# Allegro board S071AA-0413-20260423_Power.brd
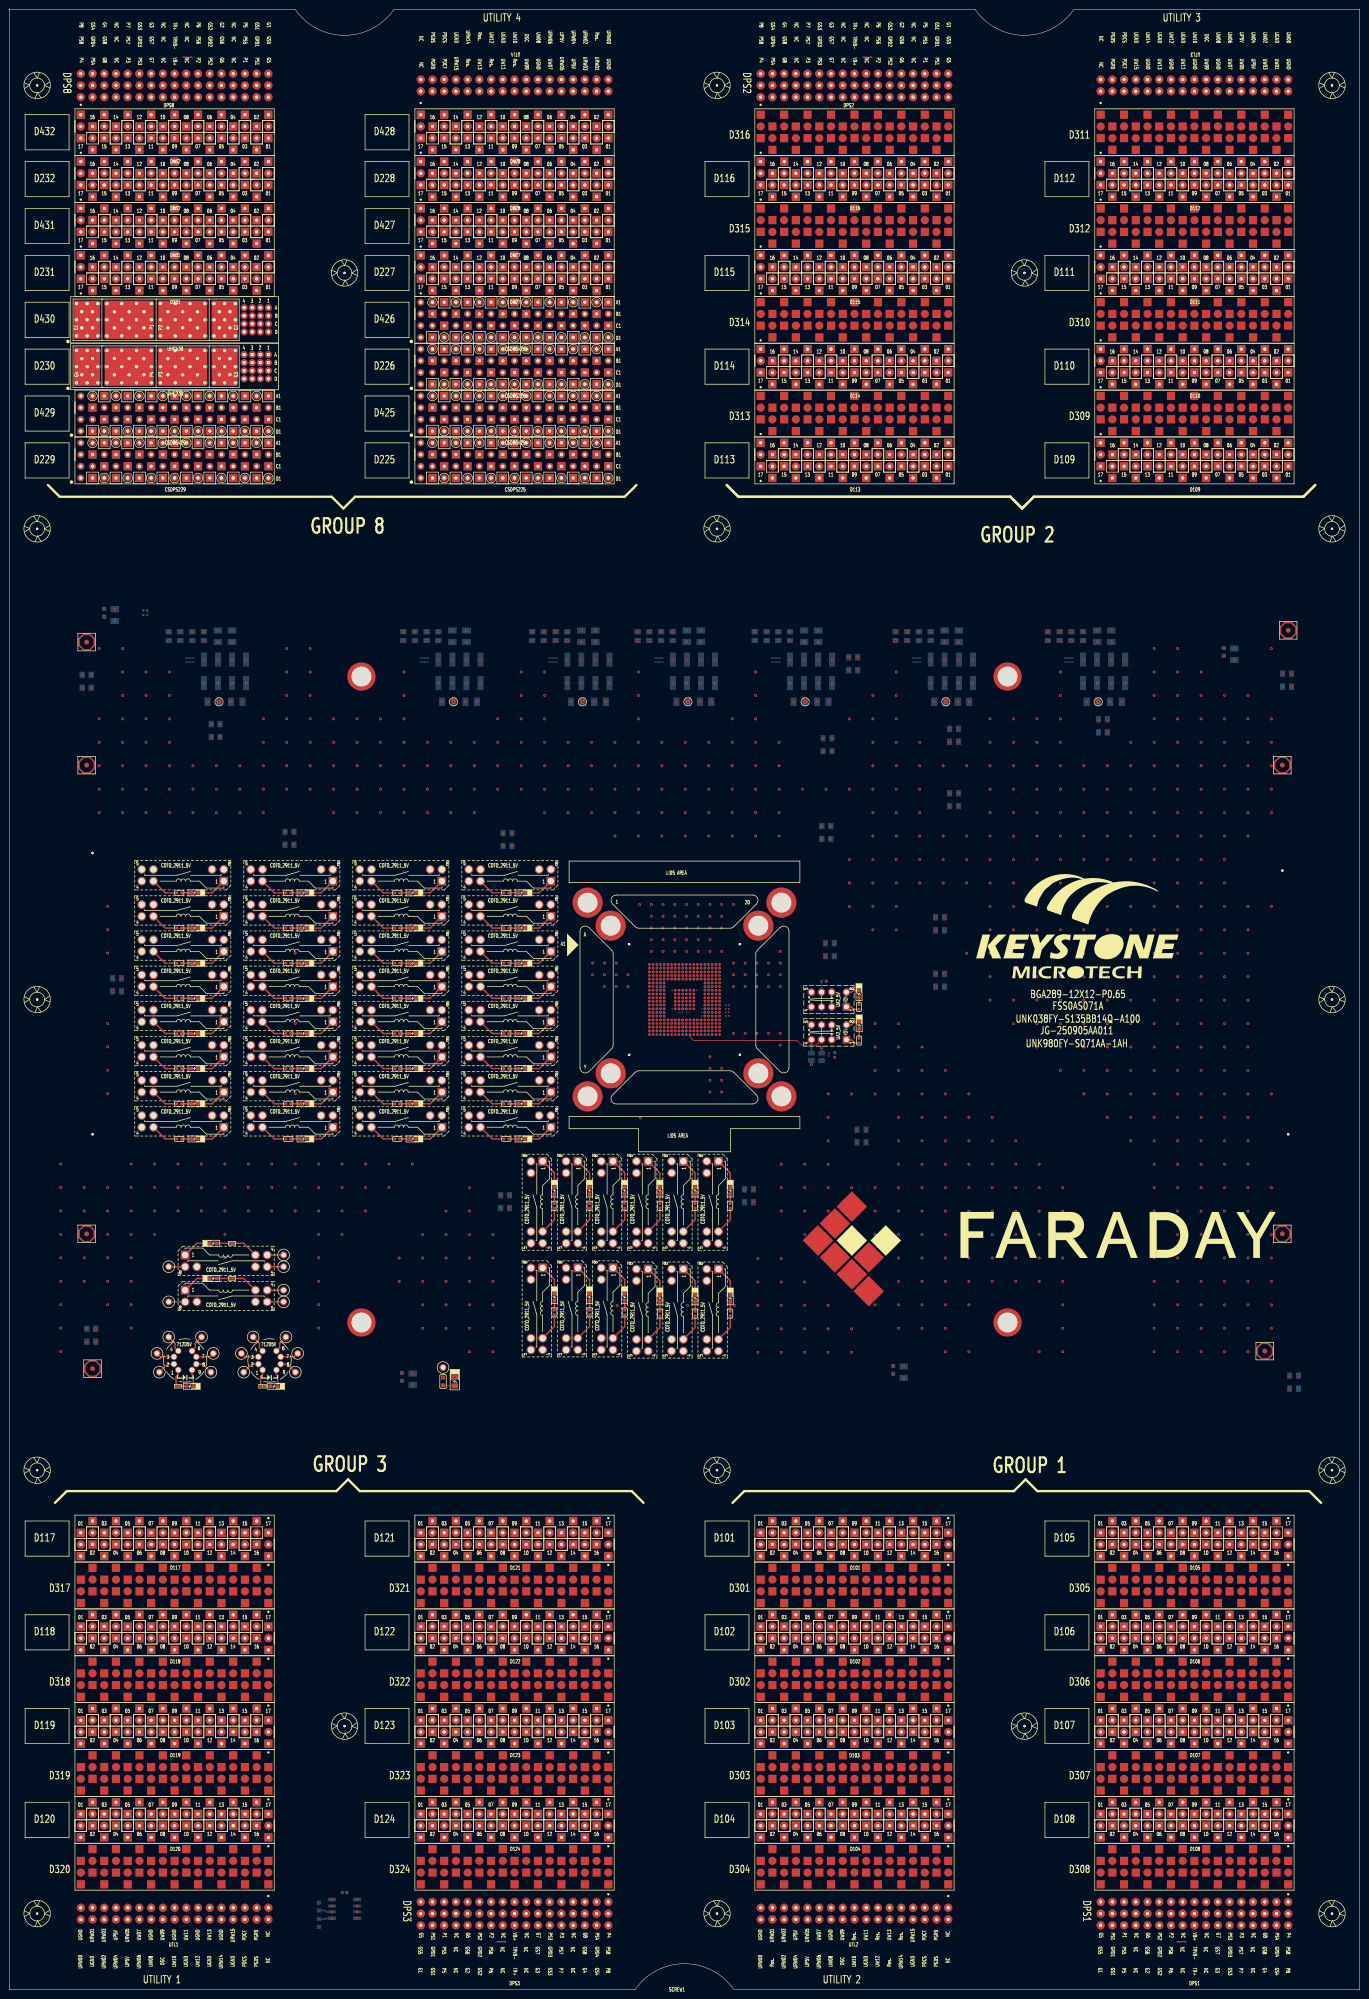
[diagram p0: board, top side]
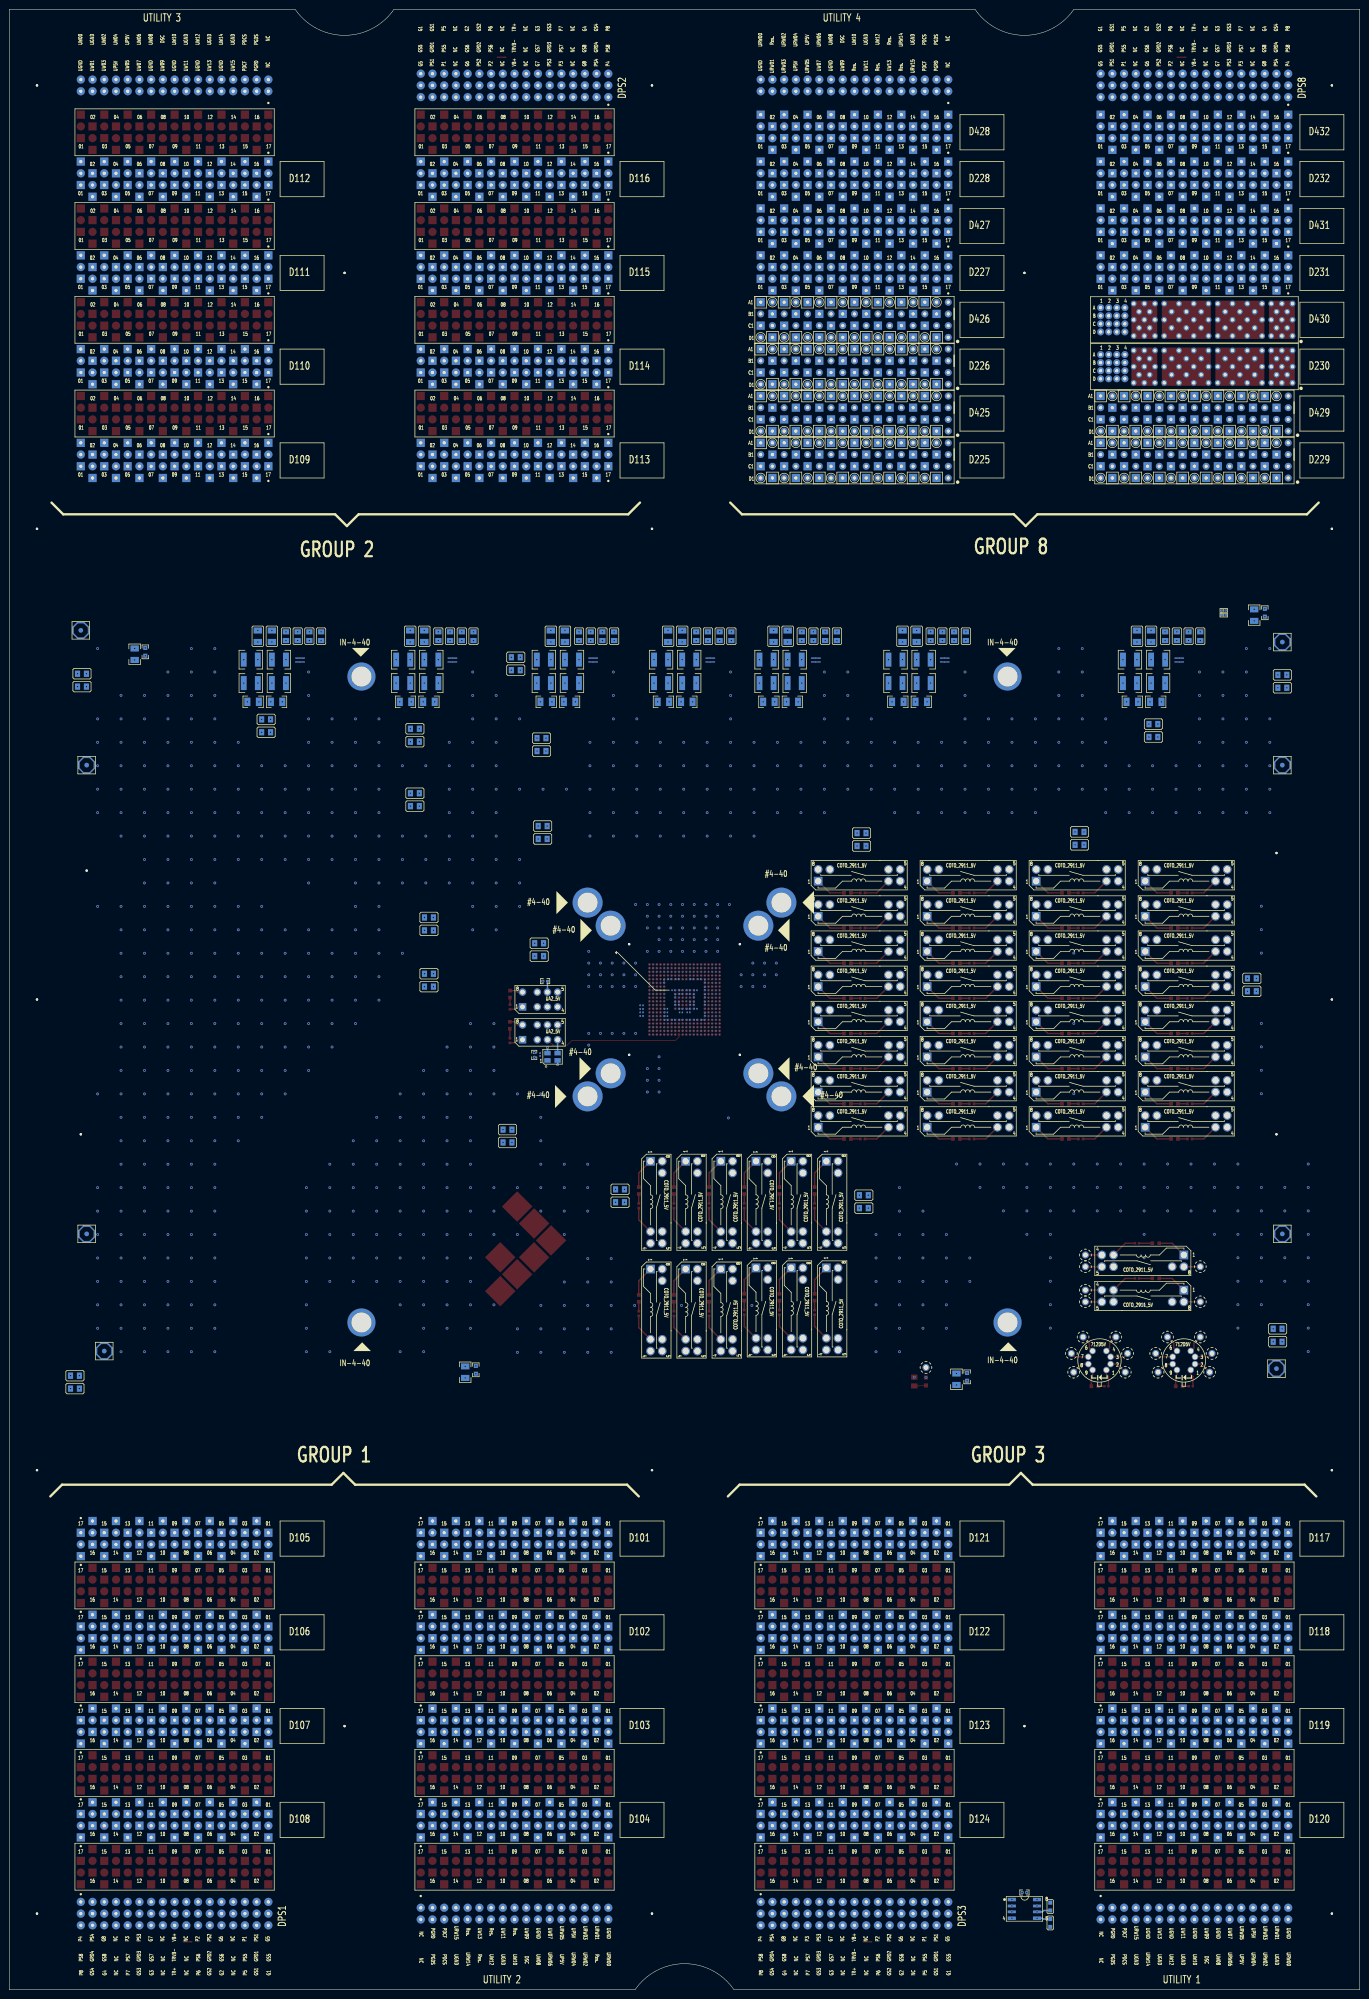
[diagram p1: board, bottom side, seen from below]

Outline 292.64 x 429.26 mm; copper layers: TOP, L02_DGND, L03_DIG, L04_DGND, L05_DIG, L06_DGND, L07_DIG, L08_DGND, L09_DPS, L10_DGND, L11_DPS, L12_DGND, L13_CBIT, L14_5V, L15_DGND, L16_DPS, L17_DGND, L18_DIG, L19_DGND, L20_DIG, L21_DGND, L22_DIG, L23_DGND, L24_DIG, L25_DGND, BOTTOM. Coordinates in mm from the lower left corner of the outline.

## Placement (name value [footprint] x y rotation side)
BDB4  BD120-3A-S8  [FB0805]  17.8 140.46 180 bottom
BDB5  BD120-3A-S8  [FB0805]  204.74 270.51 180 bottom
BDB6  BD120-3A-S8  [FB0805]  204.74 256.54 180 bottom
BDB7  BD120-3A-S8  [FB0805]  201.69 229.62 180 bottom
BDB8  BD120-3A-S8  [FB0805]  201.69 217.42 180 bottom
BDB9  BD120-3A-S8  [FB0805]  160.29 170.69 180 bottom
BDB10  BD120-3A-S8  [FB0805]  107.46 172.21 180 bottom
BDB13  BD120-3A-S8  [FB0805]  107.97 250.7 180 bottom
BDB14  BD120-3A-S8  [FB0805]  60.72 250.95 180 bottom
BDB15  BD120-3A-S8  [FB0805]  107.97 247.9 180 bottom
BDB16  BD120-3A-S8  [FB0805]  60.72 248.16 180 bottom
BDB17  BD120-3A-S8  [FB0805]  107.46 169.42 180 bottom
BDB18  BD120-3A-S8  [FB0805]  160.29 173.48 180 bottom
BDB19  BD120-3A-S8  [FB0805]  276.88 285.24 180 bottom
BDB20  BD120-3A-S8  [FB0805]  278.4 130.3 180 bottom
BDB21  BD120-3A-S8  [FB0805]  278.4 133.1 180 bottom
BDB22  BD120-3A-S8  [FB0805]  177.05 249.43 180 bottom
BDB23  BD120-3A-S8  [FB0805]  177.05 252.22 180 bottom
BDB24  BD120-3A-S8  [FB0805]  177.82 224.03 180 bottom
BDB25  BD120-3A-S8  [FB0805]  177.82 226.82 180 bottom
BDB26  BD120-3A-S8  [FB0805]  182.88 288.8 180 bottom
BDB27  BD120-3A-S8  [FB0805]  182.88 286 180 bottom
BDB28  BD120-3A-S8  [FB0805]  177.31 271.27 180 bottom
BDB29  BD120-3A-S8  [FB0805]  177.31 268.48 180 bottom
BDB30  BD120-3A-S8  [FB0805]  44.72 271.53 180 bottom
BDB31  BD120-3A-S8  [FB0805]  44.72 274.32 180 bottom
BDB32  BD120-3A-S8  [FB0805]  23.38 216.41 180 bottom
BDB33  BD120-3A-S8  [FB0805]  23.38 219.2 180 bottom
BDB34  BD120-3A-S8  [FB0805]  236.98 275.34 180 bottom
BDB35  BD120-3A-S8  [FB0805]  236.98 272.54 180 bottom
BDB36  BD120-3A-S8  [FB0805]  184.67 186.44 180 bottom
BDB37  BD120-3A-S8  [FB0805]  184.67 183.64 180 bottom
BDB38  BD120-3A-S8  [FB0805]  204.74 273.3 180 bottom
BDB39  BD120-3A-S8  [FB0805]  204.74 259.33 180 bottom
BDB40  BD120-3A-S8  [FB0805]  201.69 232.41 180 bottom
BDB41  BD120-3A-S8  [FB0805]  201.69 220.22 180 bottom
BDB42  BD120-3A-S8  [FB0805]  276.88 282.45 180 bottom
BDB43  BD120-3A-S8  [FB0805]  17.8 143.26 180 bottom
BDB44  BD120-3A-S8  [FB0805]  16.78 284.99 180 bottom
BDB45  BD120-3A-S8  [FB0805]  16.78 282.19 180 bottom
BGA289-12X12-P0.65  REF-CODE-SOCKET  [SOCKET_CODE]  231.41 215.9 0 top
C1  0.01U-16-X7R-S4-YA  [C0402]  178.87 202.62 270 bottom
C2  3.3U-10-X-S4-TDK  [C0402]  176.52 218.6 0 bottom
C3  10U-25-X7R-SA  [C1206]  150.89 279.15 0 bottom
C4  NC/10U-25-X7R-SA  [C1206]  145.81 279.15 180 bottom
C5  22U-16-X-SB  [C1210]  151.4 283.21 0 bottom
C6  NC/47U-16-X5R-SB-MU  [C1210]  151.4 288.29 0 bottom
C7  NC/100U-10-X5R-SB-MU  [C1210]  145.3 288.29 180 bottom
C8  NC/22U-16-X-SB  [C1210]  145.3 283.21 180 bottom
C9  0.1U-16-X-S2-TDK  [C0201]  177.6 202.69 270 bottom
C10  0.1U-16-X-S2-TDK  [C0201]  148.72 210.23 0 bottom
C11  0.1U-16-X-S2-TDK  [C0201]  143.92 210.23 180 bottom
C12  0.1U-16-X-S2-TDK  [C0201]  147.08 211.84 180 bottom
C13  0.1U-16-X-S2-TDK  [C0201]  145.52 210.23 0 bottom
C14  0.1U-16-X-S2-TDK  [C0201]  147.12 212.63 180 bottom
C15  0.1U-16-X-S2-TDK  [C0201]  145.45 211.84 0 bottom
C16  0.1U-16-X-S2-TDK  [C0201]  145.52 212.63 0 bottom
C17  0.1U-16-X-S2-TDK  [C0201]  142.32 210.23 0 bottom
C18  0.1U-16-X-S2-TDK  [C0201]  141.92 211.43 90 bottom
C19  0.1U-16-X-S2-TDK  [C0201]  148.32 213.83 90 bottom
C20  0.1U-16-X-S2-TDK  [C0201]  155.61 211.84 0 bottom
C21  0.1U-16-X-S2-TDK  [C0201]  141.92 215.43 90 bottom
C22  0.1U-16-X-S2-TDK  [C0201]  155.61 212.6 0 bottom
C23  0.1U-16-X-S2-TDK  [C0201]  155.61 213.36 0 bottom
C24  0.1U-16-X-S2-TDK  [C0201]  155.61 211.07 0 bottom
C25  0.1U-16-X-S2-TDK  [C0201]  150.32 211.03 180 bottom
C26  0.1U-16-X-S2-TDK  [C0201]  150.32 212.63 180 bottom
C27  0.1U-16-X-S2-TDK  [C0201]  150.32 210.23 180 bottom
C28  0.1U-16-X-S2-TDK  [C0201]  147.12 210.23 180 bottom
C29  0.1U-16-X-S2-TDK  [C0201]  150.32 211.83 180 bottom
C30  0.1U-16-X-S2-TDK  [C0201]  141.92 213.83 270 bottom
C31  0.1U-16-X-S2-TDK  [C0201]  141.92 217.03 270 bottom
C32  0.1U-16-X-S2-TDK  [C0201]  149.52 219.03 180 bottom
C33  0.1U-16-X-S2-TDK  [C0201]  141.92 218.63 90 bottom
C34  0.1U-16-X-S2-TDK  [C0201]  150.72 218.63 270 bottom
C35  0.1U-16-X-S2-TDK  [C0201]  147.92 219.03 0 bottom
C36  0.1U-16-X-S2-TDK  [C0201]  144.72 219.03 0 bottom
C37  0.1U-16-X-S2-TDK  [C0201]  143.12 219.03 180 bottom
C38  0.1U-16-X-S2-TDK  [C0201]  144.32 215.43 270 bottom
C39  0.1U-16-X-S2-TDK  [C0201]  147.52 213.83 90 bottom
C40  0.1U-16-X-S2-TDK  [C0201]  143.92 212.63 180 bottom
C41  0.1U-16-X-S2-TDK  [C0201]  145.12 213.83 90 bottom
C42  0.1U-16-X-S2-TDK  [C0201]  144.32 213.83 90 bottom
C43  0.1U-16-X-S2-TDK  [C0201]  143.92 216.63 180 bottom
C44  0.1U-16-X-S2-TDK  [C0201]  148.32 215.43 270 bottom
C45  0.1U-16-X-S2-TDK  [C0201]  148.72 216.63 0 bottom
C46  0.1U-16-X-S2-TDK  [C0201]  147.12 215.83 180 bottom
C47  0.1U-16-X-S2-TDK  [C0201]  147.12 216.63 180 bottom
C48  0.1U-16-X-S2-TDK  [C0201]  145.52 215.83 0 bottom
C49  0.1U-16-X-S2-TDK  [C0201]  145.52 216.63 0 bottom
C50  10U-25-X7R-SA  [C1206]  206.77 279.15 0 bottom
C51  NC/10U-25-X7R-SA  [C1206]  201.69 279.15 180 bottom
C52  22U-16-X-SB  [C1210]  207.28 283.21 0 bottom
C53  NC/47U-16-X5R-SB-MU  [C1210]  207.28 288.29 0 bottom
C54  NC/100U-10-X5R-SB-MU  [C1210]  201.18 288.29 180 bottom
C55  NC/22U-16-X-SB  [C1210]  201.18 283.21 180 bottom
C56  10U-25-X7R-SA  [C1206]  239.79 279.15 0 bottom
C57  22U-16-X-SB  [C1210]  240.3 283.21 0 bottom
C58  NC/10U-25-X7R-SA  [C1206]  234.71 279.15 180 bottom
C59  NC/47U-16-X5R-SB-MU  [C1210]  240.3 288.29 0 bottom
C60  NC/100U-10-X5R-SB-MU  [C1210]  234.2 288.29 180 bottom
C61  NC/22U-16-X-SB  [C1210]  234.2 283.21 180 bottom
C62  10U-25-X7R-SA  [C1206]  49.29 279.15 0 bottom
C63  22U-16-X-SB  [C1210]  49.8 283.21 0 bottom
C64  NC/10U-25-X7R-SA  [C1206]  44.21 279.15 180 bottom
C65  NC/47U-16-X5R-SB-MU  [C1210]  49.8 288.29 0 bottom
C66  NC/100U-10-X5R-SB-MU  [C1210]  43.7 288.29 180 bottom
C67  NC/22U-16-X-SB  [C1210]  43.7 283.21 180 bottom
C68  10U-25-X7R-SA  [C1206]  176.29 279.15 0 bottom
C69  22U-16-X-SB  [C1210]  176.8 283.21 0 bottom
C70  NC/10U-25-X7R-SA  [C1206]  171.21 279.15 180 bottom
C71  NC/47U-16-X5R-SB-MU  [C1210]  176.8 288.29 0 bottom
C72  NC/100U-10-X5R-SB-MU  [C1210]  170.7 288.29 180 bottom
C73  NC/22U-16-X-SB  [C1210]  170.7 283.21 180 bottom
C74  10U-25-X7R-SA  [C1206]  100.09 279.15 0 bottom
C75  22U-16-X-SB  [C1210]  100.6 283.21 0 bottom
C76  NC/10U-25-X7R-SA  [C1206]  95.01 279.15 180 bottom
C77  NC/47U-16-X5R-SB-MU  [C1210]  100.6 288.29 0 bottom
C78  NC/100U-10-X5R-SB-MU  [C1210]  94.5 288.29 180 bottom
C79  NC/22U-16-X-SB  [C1210]  94.5 283.21 180 bottom
C80  22U-16-X-SB  [C1210]  128.54 283.21 0 bottom
C81  10U-25-X7R-SA  [C1206]  128.03 279.15 0 bottom
C82  NC/10U-25-X7R-SA  [C1206]  122.95 279.15 180 bottom
C83  NC/47U-16-X5R-SB-MU  [C1210]  128.54 288.29 0 bottom
C84  NC/100U-10-X5R-SB-MU  [C1210]  122.44 288.29 180 bottom
C85  NC/22U-16-X-SB  [C1210]  122.44 283.21 180 bottom
CB1  0.1U-25-X-S6  [C0603]  85.09 132.84 270 bottom
CB2  10U-25-X7R-SA  [C1206]  22.88 297.94 270 bottom
CB3  0.1U-25-X-S6  [C0603]  191.53 134.37 270 bottom
CB4  10U-25-X7R-SA  [C1206]  193.84 133.86 270 bottom
CB5  0.1U-25-X-S6  [C0603]  263.16 289.98 270 bottom
CB6  10U-25-X7R-SA  [C1206]  265.47 289.47 270 bottom
CB7  0.1U-25-X-S6  [C0603]  20.57 298.45 270 bottom
CB8  10U-25-X7R-SA  [C1206]  87.39 132.33 270 bottom
CSDPS225  V93K_CSDPS_DPS32  [PG_VG93K_PF_DPS32_G8D225]  109.49 331.47 0 top
CSDPS226  V93K_CSDPS  [PG_VG93K_PF_DPS32_G8D226]  109.49 351.79 0 top
CSDPS229  V93K_CSDPS_DPS32  [PG_VG93K_PF_DPS32_G8D229]  35.83 331.47 0 top
CSDPS425  V93K_CSDPS_DPS32  [PG_VG93K_PF_DPS32_G8D425]  109.49 341.63 0 top
CSDPS426  V93K_CSDPS  [PG_VG93K_PF_DPS32_G8D426]  109.49 361.95 0 top
CSDPS429  V93K_CSDPS_DPS32  [PG_VG93K_PF_DPS32_G8D429]  35.83 341.63 0 top
D101  V93K_CH  [PG_VG93K_F_G1D101]  183.15 97.79 0 top
D102  V93K_CH  [PG_VG93K_F_G1D102]  183.15 77.47 0 top
D103  V93K_CH  [PG_VG93K_F_G1D103]  183.15 57.15 0 top
D104  V93K_CH  [PG_VG93K_F_G1D104]  183.15 36.83 0 top
D105  V93K_CH  [PG_VG93K_F_G1D105]  256.81 97.79 0 top
D106  V93K_CH  [PG_VG93K_F_G1D106]  256.81 77.47 0 top
D107  V93K_CH  [PG_VG93K_F_G1D107]  256.81 57.15 0 top
D108  V93K_CH  [PG_VG93K_F_G1D108]  256.81 36.83 0 top
D109  V93K_CH  [PG_VG93K_F_G2D109]  256.81 331.47 0 top
D110  V93K_CH  [PG_VG93K_F_G2D110]  256.81 351.79 0 top
D111  V93K_CH  [PG_VG93K_F_G2D111]  256.81 372.11 0 top
D112  V93K_CH  [PG_VG93K_F_G2D112]  256.81 392.43 0 top
D113  V93K_CH  [PG_VG93K_F_G2D113]  183.15 331.47 0 top
D114  V93K_CH  [PG_VG93K_F_G2D114]  183.15 351.79 0 top
D115  V93K_CH  [PG_VG93K_F_G2D115]  183.15 372.11 0 top
D116  V93K_CH  [PG_VG93K_F_G2D116]  183.15 392.43 0 top
D117  V93K_CH  [PG_VG93K_F_G3D117]  35.83 97.79 0 top
D118  V93K_CH  [PG_VG93K_F_G3D118]  35.83 77.47 0 top
D119  V93K_CH  [PG_VG93K_F_G3D119]  35.83 57.15 0 top
D120  V93K_CH  [PG_VG93K_F_G3D120]  35.83 36.83 0 top
D121  V93K_CH  [PG_VG93K_F_G3D121]  109.49 97.79 0 top
D122  V93K_CH  [PG_VG93K_F_G3D122]  109.49 77.47 0 top
D123  V93K_CH  [PG_VG93K_F_G3D123]  109.49 57.15 0 top
D124  V93K_CH  [PG_VG93K_F_G3D124]  109.49 36.83 0 top
D227  V93K_CH  [PG_VG93K_F_G8D227]  109.49 372.11 0 top
D228  V93K_CH  [PG_VG93K_F_G8D228]  109.49 392.43 0 top
D231  V93K_CH  [PG_VG93K_F_G8D231]  35.83 372.11 0 top
D232  V93K_CH  [PG_VG93K_F_G8D232]  35.83 392.43 0 top
D301  V93K_CH  [PG_VG93K_F_PS1600SD_G1_ND]  183.15 87.63 0 top
D302  V93K_CH  [PG_VG93K_F_PS1600SD_G1_ND]  183.15 67.31 0 top
D303  V93K_CH  [PG_VG93K_F_PS1600SD_G1_ND]  183.15 46.99 0 top
D304  V93K_CH  [PG_VG93K_F_PS1600SD_G1_ND]  183.15 26.67 0 top
D305  V93K_CH  [PG_VG93K_F_PS1600SD_G1_ND]  256.81 87.63 0 top
D306  V93K_CH  [PG_VG93K_F_PS1600SD_G1_ND]  256.81 67.31 0 top
D307  V93K_CH  [PG_VG93K_F_PS1600SD_G1_ND]  256.81 46.99 0 top
D308  V93K_CH  [PG_VG93K_F_PS1600SD_G1_ND]  256.81 26.67 0 top
D309  V93K_CH  [PG_VG93K_F_PS1600SD_G2_ND]  256.81 341.63 0 top
D310  V93K_CH  [PG_VG93K_F_PS1600SD_G2_ND]  256.81 361.95 0 top
D311  V93K_CH  [PG_VG93K_F_PS1600SD_G2_ND]  256.81 402.59 0 top
D312  V93K_CH  [PG_VG93K_F_PS1600SD_G2_ND]  256.81 382.27 0 top
D313  V93K_CH  [PG_VG93K_F_PS1600SD_G2_ND]  183.15 341.63 0 top
D314  V93K_CH  [PG_VG93K_F_PS1600SD_G2_ND]  183.15 361.95 0 top
D315  V93K_CH  [PG_VG93K_F_PS1600SD_G2_ND]  183.15 382.27 0 top
D316  V93K_CH  [PG_VG93K_F_PS1600SD_G2_ND]  183.15 402.59 0 top
D317  V93K_CH  [PG_VG93K_F_PS1600SD_G3_ND]  35.83 87.63 0 top
D318  V93K_CH  [PG_VG93K_F_PS1600SD_G3_ND]  35.83 67.31 0 top
D319  V93K_CH  [PG_VG93K_F_PS1600SD_G3_ND]  35.83 46.99 0 top
D320  V93K_CH  [PG_VG93K_F_PS1600SD_G3_ND]  35.83 26.67 0 top
D321  V93K_CH  [PG_VG93K_F_PS1600SD_G3_ND]  109.49 87.63 0 top
D322  V93K_CH  [PG_VG93K_F_PS1600SD_G3_ND]  109.49 67.31 0 top
D323  V93K_CH  [PG_VG93K_F_PS1600SD_G3_ND]  109.49 46.99 0 top
D324  V93K_CH  [PG_VG93K_F_PS1600SD_G3_ND]  109.49 26.67 0 top
D427  V93K_CH  [PG_VG93K_F_G8D427]  109.49 382.27 0 top
D428  V93K_CH  [PG_VG93K_F_G8D428]  109.49 402.59 0 top
D431  V93K_CH  [PG_VG93K_F_G8D431]  35.83 382.27 0 top
D432  V93K_CH  [PG_VG93K_F_G8D432]  35.83 402.59 0 top
DPS1  V93K_DPS  [PG_VG93K_F_G1DPS1]  256.81 16.51 0 top
DPS2  V93K_DPS  [PG_VG93K_F_G2DPS2]  183.15 412.75 0 top
DPS3  V93K_DPS  [PG_VG93K_F_G3DPS3]  109.49 16.51 0 top
DPS8  V93K_DPS  [PG_VG93K_F_G8DPS8]  35.83 412.75 0 top
FD1  FD_040  [FD_040_V2]  18.05 134.62 0 top
FD2  FD_040  [FD_040_V2]  272.05 138.43 0 top
FD3  FD_040  [FD_040_V2]  16.78 292.1 0 top
FD4  FD_040  [FD_040_V2]  277.13 294.64 0 top
FD5  FD_040  [FD_040_V2]  18.05 134.62 180 bottom
FD6  FD_040  [FD_040_V2]  272.05 138.43 180 bottom
FD7  FD_040  [FD_040_V2]  16.78 292.1 180 bottom
FD8  FD_040  [FD_040_V2]  277.13 294.64 180 bottom
FD9  FD_040  [FD_040_V2]  16.78 163.83 0 top
FD10  FD_040  [FD_040_V2]  275.86 265.43 180 bottom
FD11  FD_040  [FD_040_V2]  275.86 163.83 180 bottom
FD12  FD_040  [FD_040_V2]  16.78 163.83 180 bottom
FD13  FD_040  [FD_040_V2]  16.78 265.43 180 bottom
FD14  FD_040  [FD_040_V2]  275.86 163.83 0 top
FD15  FD_040  [FD_040_V2]  16.78 265.43 0 top
FD16  FD_040  [FD_040_V2]  275.86 265.43 0 top
FSS0AS071A  REF-CODE-CHIP  [CHIP_CODE]  231.41 213.36 0 top
H1  M3-HOLE  [M3_NPTH169]  277.13 185.42 0 top
H2  M3-HOLE  [M3_NPTH169]  18.05 246.38 0 top
H3  M3-HOLE  [M3_NPTH169]  18.05 185.42 0 top
H4  M3-HOLE  [M3_NPTH169]  275.86 242.57 0 top
JG-250905AA011  REF-CODE-SOCKET  [SOCKET_CODE]  231.16 208.03 0 top
K1  2911-05-321-A-V2  [RL_COTO2911_5V_RLPIN]  99.58 186.94 0 bottom
K2  2911-05-321-A-V2  [RL_COTO2911_5V_RLPIN]  75.96 186.94 0 bottom
K3  2911-05-321-A-V2  [RL_COTO2911_5V_RLPIN]  52.34 186.94 0 bottom
K4  2911-05-321-A-V2  [RL_COTO2911_5V_RLPIN]  28.72 209.8 0 bottom
K5  2911-05-321-A-V2  [RL_COTO2911_5V_RLPIN]  28.72 202.18 0 bottom
K6  2911-05-321-A-V2  [RL_COTO2911_5V_RLPIN]  28.72 194.56 0 bottom
K7  2911-05-321-A-V2  [RL_COTO2911_5V_RLPIN]  52.34 209.8 0 bottom
K8  2911-05-321-A-V2  [RL_COTO2911_5V_RLPIN]  52.34 202.18 0 bottom
K9  2911-05-321-A-V2  [RL_COTO2911_5V_RLPIN]  52.34 194.56 0 bottom
K10  2911-05-321-A-V2  [RL_COTO2911_5V_RLPIN]  75.96 194.56 0 bottom
K11  2911-05-321-A-V2  [RL_COTO2911_5V_RLPIN]  99.58 194.56 0 bottom
K12  2911-05-321-A-V2  [RL_COTO2911_5V_RLPIN]  75.96 202.18 0 bottom
K13  2911-05-321-A-V2  [RL_COTO2911_5V_RLPIN]  99.58 202.18 0 bottom
K14  2911-05-321-A-V2  [RL_COTO2911_5V_RLPIN]  75.96 209.8 0 bottom
K15  2911-05-321-A-V2  [RL_COTO2911_5V_RLPIN]  99.58 209.8 0 bottom
K16  2911-05-321-A-V2  [RL_COTO2911_5V_RLPIN]  28.72 186.94 0 bottom
K17  2911-05-321-A-V2  [RL_COTO2911_5V_RLPIN]  28.72 217.42 0 bottom
K18  2911-05-321-A-V2  [RL_COTO2911_5V_RLPIN]  52.34 217.42 0 bottom
K19  2911-05-321-A-V2  [RL_COTO2911_5V_RLPIN]  75.96 217.42 0 bottom
K20  2911-05-321-A-V2  [RL_COTO2911_5V_RLPIN]  99.58 217.42 0 bottom
K21  2911-05-321-A-V2  [RL_COTO2911_5V_RLPIN]  28.72 225.04 0 bottom
K22  2911-05-321-A-V2  [RL_COTO2911_5V_RLPIN]  52.34 225.04 0 bottom
K23  2911-05-321-A-V2  [RL_COTO2911_5V_RLPIN]  75.96 225.04 0 bottom
K24  2911-05-321-A-V2  [RL_COTO2911_5V_RLPIN]  99.58 225.04 0 bottom
K25  2911-05-321-A-V2  [RL_COTO2911_5V_RLPIN]  28.72 232.66 0 bottom
K26  2911-05-321-A-V2  [RL_COTO2911_5V_RLPIN]  52.34 232.66 0 bottom
K27  2911-05-321-A-V2  [RL_COTO2911_5V_RLPIN]  75.96 232.66 0 bottom
K28  2911-05-321-A-V2  [RL_COTO2911_5V_RLPIN]  99.58 232.66 0 bottom
K29  2911-05-321-A-V2  [RL_COTO2911_5V_RLPIN]  28.72 240.28 0 bottom
K30  2911-05-321-A-V2  [RL_COTO2911_5V_RLPIN]  52.34 240.28 0 bottom
K31  2911-05-321-A-V2  [RL_COTO2911_5V_RLPIN]  75.96 240.28 0 bottom
K32  2911-05-321-A-V2  [RL_COTO2911_5V_RLPIN]  99.58 240.28 0 bottom
K33  2911-05-321-A-V2  [RL_COTO2911_5V_RLPIN]  115.59 161.8 90 bottom
K34  2911-05-321-A-V2  [RL_COTO2911_5V_RLPIN]  138.45 161.8 90 bottom
K35  2911-05-321-A-V2  [RL_COTO2911_5V_RLPIN]  115.59 138.68 90 bottom
K36  2911-05-321-A-V2  [RL_COTO2911_5V_RLPIN]  138.45 138.43 90 bottom
K37  2911-05-321-A-V2  [RL_COTO2911_5V_RLPIN]  123.21 161.8 90 bottom
K38  2911-05-321-A-V2  [RL_COTO2911_5V_RLPIN]  146.07 161.8 90 bottom
K39  2911-05-321-A-V2  [RL_COTO2911_5V_RLPIN]  123.21 138.68 90 bottom
K40  2911-05-321-A-V2  [RL_COTO2911_5V_RLPIN]  146.07 138.43 90 bottom
K41  2911-05-321-A-V2  [RL_COTO2911_5V_RLPIN]  130.83 161.8 90 bottom
K42  2911-05-321-A-V2  [RL_COTO2911_5V_RLPIN]  153.69 161.8 90 bottom
K43  2911-05-321-A-V2  [RL_COTO2911_5V_RLPIN]  130.83 138.68 90 bottom
K44  2911-05-321-A-V2  [RL_COTO2911_5V_RLPIN]  153.69 138.43 90 bottom
K45  UA2-5NJ-A-V3  [RL_NECUA2_5V_V3]  177.82 207.52 0 bottom
K46  UA2-5NJ-A-V3  [RL_NECUA2_5V_V3]  177.82 214.63 0 bottom
KB1-2  TP03-D  [TP_060_040]  32.53 133.86 0 top
KB1-3  TP03-D  [TP_060_040]  32.02 137.92 0 top
KB1-4  TP03-D  [TP_060_040]  34.56 141.48 0 top
KB1-6  TP03-D  [TP_060_040]  41.67 141.48 0 top
KB1-7  TP03-D  [TP_060_040]  44.21 137.92 0 top
KB1-8  TP03-D  [TP_060_040]  43.7 133.86 0 top
KB2-2  TP03-D  [TP_060_040]  50.82 133.86 0 top
KB2-3  TP03-D  [TP_060_040]  50.31 137.92 0 top
KB2-4  TP03-D  [TP_060_040]  52.85 141.48 0 top
KB2-6  TP03-D  [TP_060_040]  59.96 141.48 0 top
KB2-7  TP03-D  [TP_060_040]  62.5 137.92 0 top
KB2-8  TP03-D  [TP_060_040]  61.99 133.86 0 top
KB3-4  TP03-D  [TP_060_040]  59.45 151.64 0 top
KB3-5  TP03-D  [TP_060_040]  59.45 149.1 0 top
KB3-8  TP03-D  [TP_060_040]  34.56 149.1 0 top
KB4-4  TP03-D  [TP_060_040]  59.45 159.26 0 top
KB4-5  TP03-D  [TP_060_040]  59.45 156.72 0 top
KB4-8  TP03-D  [TP_060_040]  34.56 156.72 0 top
KS1  NC/712D-5-V2  [RL_712D_5V_V2]  38.12 136.4 180 bottom
KS2  NC/712D-5-V2  [RL_712D_5V_V2]  56.4 136.4 180 bottom
KS3  NC/2911-05-321-A  [RL_COTO2911_5V_RLPIN]  55.9 151.64 180 bottom
KS4  NC/2911-05-321-A  [RL_COTO2911_5V_RLPIN]  55.9 159.26 180 bottom
LD1  LDG-2-S6  [LED_0603]  111.01 184.4 180 top
LD2  LDG-2-S6  [LED_0603]  87.39 184.4 180 top
LD3  LDG-2-S6  [LED_0603]  63.77 184.4 180 top
LD4  LDG-2-S6  [LED_0603]  40.15 207.26 180 top
LD5  LDG-2-S6  [LED_0603]  40.15 199.64 180 top
LD6  LDG-2-S6  [LED_0603]  40.15 192.02 180 top
LD7  LDG-2-S6  [LED_0603]  63.77 207.26 180 top
LD8  LDG-2-S6  [LED_0603]  63.77 199.64 180 top
LD9  LDG-2-S6  [LED_0603]  63.77 192.02 180 top
LD10  LDG-2-S6  [LED_0603]  87.39 192.02 180 top
LD11  LDG-2-S6  [LED_0603]  111.01 192.02 180 top
LD12  LDG-2-S6  [LED_0603]  87.39 199.64 180 top
LD13  LDG-2-S6  [LED_0603]  111.01 199.64 180 top
LD14  LDG-2-S6  [LED_0603]  87.39 207.26 180 top
LD15  LDG-2-S6  [LED_0603]  111.01 207.26 180 top
LD16  LDG-2-S6  [LED_0603]  40.15 184.4 180 top
LD17  LDG-2-S6  [LED_0603]  40.15 214.88 180 top
LD18  LDG-2-S6  [LED_0603]  63.77 214.88 180 top
LD19  LDG-2-S6  [LED_0603]  87.39 214.88 180 top
LD20  LDG-2-S6  [LED_0603]  111.01 214.88 180 top
LD21  LDG-2-S6  [LED_0603]  40.15 222.5 180 top
LD22  LDG-2-S6  [LED_0603]  63.77 222.5 180 top
LD23  LDG-2-S6  [LED_0603]  87.39 222.5 180 top
LD24  LDG-2-S6  [LED_0603]  111.01 222.5 180 top
LD25  LDG-2-S6  [LED_0603]  40.15 230.12 180 top
LD26  LDG-2-S6  [LED_0603]  63.77 230.12 180 top
LD27  LDG-2-S6  [LED_0603]  87.39 230.12 180 top
LD28  LDG-2-S6  [LED_0603]  111.01 230.12 180 top
LD29  LDG-2-S6  [LED_0603]  40.15 237.74 180 top
LD30  LDG-2-S6  [LED_0603]  63.77 237.74 180 top
LD31  LDG-2-S6  [LED_0603]  87.39 237.74 180 top
LD32  LDG-2-S6  [LED_0603]  111.01 237.74 180 top
LD33  LDG-2-S6  [LED_0603]  118.13 173.23 270 top
LD34  LDG-2-S6  [LED_0603]  140.99 173.23 270 top
LD35  LDG-2-S6  [LED_0603]  118.13 150.11 270 top
LD36  LDG-2-S6  [LED_0603]  140.99 149.86 270 top
LD37  LDG-2-S6  [LED_0603]  125.75 173.23 270 top
LD38  LDG-2-S6  [LED_0603]  148.61 173.23 270 top
LD39  LDG-2-S6  [LED_0603]  125.75 150.11 270 top
LD40  LDG-2-S6  [LED_0603]  148.61 149.86 270 top
LD41  LDG-2-S6  [LED_0603]  133.37 173.23 270 top
LD42  LDG-2-S6  [LED_0603]  156.23 173.23 270 top
LD43  LDG-2-S6  [LED_0603]  133.37 150.11 270 top
LD44  LDG-2-S6  [LED_0603]  156.23 149.86 270 top
LD45  LDG-2-S6  [LED_0603]  184.17 209.04 270 top
LD46  LDG-2-S6  [LED_0603]  184.13 215.81 270 top
LDB1  LDG-2-S8  [LED_0805]  96.54 131.83 270 top
LDB2  LDG-2-S6  [LED_0603]  39.13 130.81 180 top
LDB3  LDG-2-S6  [LED_0603]  57.42 130.81 180 top
LDB4  LDG-2-S6  [LED_0603]  44.21 154.18 0 top
LDB5  LDG-2-S6  [LED_0603]  44.21 161.8 0 top
LOGO1  -  [LOGO_KT_KSMT]  228.36 223.52 0 top
LOGO2  LOGO_FY_Faraday  [LOGO_FY_FARADAY]  223.54 158.75 0 top
LRB1  330-1-S6  [R0603]  94 131.83 90 top
LRB2  470-1-S4  [R0402_UNBGA_V2]  36.59 130.81 0 top
LRB3  470-1-S4  [R0402_UNBGA_V2]  54.88 130.81 0 top
LRB4  470-1-S4  [R0402_UNBGA_V2]  48.28 154.18 180 top
LRB5  470-1-S4  [R0402_UNBGA_V2]  48.28 161.8 180 top
M5  V93K-TOUCHSENSOR-FY  [V93K_TOUCHSENSOR_FY]  146.32 214.63 0 top
NOREF  -  []  145.22 216.63 0 top
NOREF#2  -  []  142.24 214.83 90 top
NOREF#3  -  []  86.54 199.19 90 top
NOREF#4  -  []  156.21 211.52 90 top
NOREF#5  -  []  203.47 45.72 90 top
NOREF#6  -  []  56.57 130.36 90 top
NOREF#7  -  []  86.54 214.43 90 top
NOREF#8  -  []  84.64 133.69 0 top
NOREF#9  -  []  237.76 281.18 0 top
NOREF#10  -  []  62.92 206.81 90 top
NOREF#11  -  []  110.26 230.12 0 top
NOREF#12  -  []  125.75 172.48 90 top
NOREF#13  -  []  47.85 161.8 0 top
NOREF#14  -  []  48.28 288.29 0 top
NOREF#15  -  []  178.22 216.23 0 top
NOREF#16  -  []  181.42 213.03 0 top
NOREF#17  -  []  198.64 290.32 0 top
NOREF#18  -  []  39.4 184.4 0 top
NOREF#19  -  []  39.4 199.64 0 top
NOREF#20  -  []  110.26 184.4 0 top
NOREF#21  -  []  62.37 198.99 90 top
NOREF#22  -  []  146.52 216.15 0 top
NOREF#23  -  []  39.3 206.81 90 top
NOREF#24  -  []  39.4 222.5 0 top
NOREF#25  -  []  153.94 286.26 90 top
NOREF#26  -  []  173.82 203.02 0 top
NOREF#27  -  []  45.06 153.73 90 top
NOREF#28  -  []  97.54 130.03 90 top
NOREF#29  -  []  63.02 192.02 0 top
NOREF#30  -  []  165.37 30.48 0 top
NOREF#31  -  []  238.78 283.21 0 top
NOREF#32  -  []  148.42 210.23 0 top
NOREF#33  -  []  203.47 86.36 90 top
NOREF#34  -  []  38.75 198.99 90 top
NOREF#35  -  []  39.4 230.12 0 top
NOREF#36  -  []  156.21 210.75 90 top
NOREF#37  -  []  136.44 199.53 90 top
NOREF#38  -  []  54.09 131.2 0 top
NOREF#39  -  []  165.37 50.8 0 top
NOREF#40  -  []  62.92 191.57 90 top
NOREF#41  -  []  148.52 218.71 90 top
NOREF#42  -  []  140.54 172.38 0 top
NOREF#43  -  []  132.92 172.38 0 top
NOREF#44  -  []  143.78 288.29 0 top
NOREF#45  -  []  28.69 297.55 0 top
NOREF#46  -  []  47.49 161.41 0 top
NOREF#47  -  []  119.9 286.26 90 top
NOREF#48  -  []  41.16 281.18 90 top
NOREF#49  -  []  86.64 199.64 0 top
NOREF#50  -  []  146.82 210.23 0 top
NOREF#51  -  []  199.66 283.21 0 top
NOREF#52  -  []  165.37 71.12 0 top
NOREF#53  -  []  63.02 207.26 0 top
NOREF#54  -  []  176.02 216.23 0 top
NOREF#55  -  []  110.16 199.19 0 top
NOREF#56  -  []  141.72 209.91 0 top
NOREF#57  -  []  62.92 229.67 0 top
NOREF#58  -  []  155.78 149.01 0 top
NOREF#59  -  []  62.37 221.85 90 top
NOREF#60  -  []  118.58 149.26 90 top
NOREF#61  -  []  236.49 48.26 0 top
NOREF#62  -  []  148.61 149.11 90 top
NOREF#63  -  []  118.13 149.36 90 top
NOREF#64  -  []  62.92 206.81 0 top
NOREF#65  -  []  144.8 214.43 0 top
NOREF#66  -  []  146.05 211.52 90 top
NOREF#67  -  []  316.32 293.63 90 top
NOREF#68  -  []  203.47 25.4 90 top
NOREF#69  -  []  155.31 211.07 0 top
NOREF#70  -  []  184.17 208.29 90 top
NOREF#71  -  []  145.44 213.23 90 top
NOREF#72  -  []  156.21 213.04 90 top
NOREF#73  -  []  38.28 130.36 0 top
NOREF#74  -  []  103.14 281.18 90 top
NOREF#75  -  []  62.92 222.05 0 top
NOREF#76  -  []  146.12 215.51 90 top
NOREF#77  -  []  86.64 222.5 0 top
NOREF#78  -  []  148.12 216.31 0 top
NOREF#79  -  []  39.4 192.02 0 top
NOREF#80  -  []  141.6 219.23 0 top
NOREF#81  -  []  138.72 207.03 90 top
NOREF#82  -  []  204.74 286.26 0 top
NOREF#83  -  []  86.64 192.02 0 top
NOREF#84  -  []  109.61 237.09 90 top
NOREF#85  -  []  91.96 290.32 0 top
NOREF#86  -  []  120.92 288.29 0 top
NOREF#87  -  []  110.16 206.81 90 top
NOREF#88  -  []  142.92 209.91 90 top
NOREF#89  -  []  110.16 214.43 0 top
NOREF#90  -  []  121.32 186.63 90 top
NOREF#91  -  []  277.13 25.4 90 top
NOREF#92  -  []  110.16 237.29 90 top
NOREF#93  -  []  92.98 283.21 0 top
NOREF#94  -  []  149.06 149.01 90 top
NOREF#95  -  []  110.16 214.43 90 top
NOREF#96  -  []  138.72 222.23 0 top
NOREF#97  -  []  149.22 219.03 0 top
NOREF#98  -  []  232.68 288.29 0 top
NOREF#99  -  []  149.72 211.35 0 top
NOREF#100  -  []  95.81 130.73 0 top
NOREF#101  -  []  56.57 130.36 0 top
NOREF#102  -  []  146.12 209.91 90 top
NOREF#103  -  []  86.64 207.26 0 top
NOREF#104  -  []  110.26 192.02 0 top
NOREF#105  -  []  174.26 286.26 0 top
NOREF#106  -  []  142.24 210.83 90 top
NOREF#107  -  []  -23.68 135.63 0 top
NOREF#108  -  []  52.34 281.18 90 top
NOREF#109  -  []  47.85 154.18 0 top
NOREF#110  -  []  62.37 191.37 90 top
NOREF#111  -  []  142.52 219.35 0 top
NOREF#112  -  []  125.1 148.71 0 top
NOREF#113  -  []  176.02 209.12 0 top
NOREF#114  -  []  130.32 230.63 0 top
NOREF#115  -  []  126 286.26 0 top
NOREF#116  -  []  169.18 288.29 0 top
NOREF#117  -  []  126.2 149.26 90 top
NOREF#118  -  []  149.88 288.29 0 top
NOREF#119  -  []  141.92 213.53 90 top
NOREF#120  -  []  38.75 229.47 90 top
NOREF#121  -  []  173.82 209.12 0 top
NOREF#122  -  []  209.82 281.18 90 top
NOREF#123  -  []  175.28 283.21 0 top
NOREF#124  -  []  148.42 216.63 0 top
NOREF#125  -  []  231.66 281.18 90 top
NOREF#126  -  []  138.72 222.23 0 top
NOREF#127  -  []  126 281.18 0 top
NOREF#128  -  []  150.4 218.03 0 top
NOREF#129  -  []  28.69 297.55 90 top
NOREF#130  -  []  162.83 27.94 0 top
NOREF#131  -  []  181.42 213.03 90 top
NOREF#132  -  []  98.06 281.18 0 top
NOREF#133  -  []  85.99 191.37 90 top
NOREF#134  -  []  141.6 216.43 0 top
NOREF#135  -  []  39.3 183.95 90 top
NOREF#136  -  []  62.37 206.61 90 top
NOREF#137  -  []  238.78 288.29 0 top
NOREF#138  -  []  86.54 214.43 0 top
NOREF#139  -  []  95.54 130.03 0 top
NOREF#140  -  []  125.3 172.38 0 top
NOREF#141  -  []  141.44 149.01 90 top
NOREF#142  -  []  155.31 212.6 0 top
NOREF#143  -  []  198.64 281.18 90 top
NOREF#144  -  []  172.82 200.62 90 top
NOREF#145  -  []  133.82 149.26 90 top
NOREF#146  -  []  138.72 221.43 90 top
NOREF#147  -  []  286.62 16.51 90 top
NOREF#148  -  []  173.82 209.12 0 top
NOREF#149  -  []  125.75 149.36 90 top
NOREF#150  -  []  125.32 193.63 90 top
NOREF#151  -  []  121.32 189.63 90 top
NOREF#152  -  []  110.16 222.05 0 top
NOREF#153  -  []  150.4 218.03 90 top
NOREF#154  -  []  42.18 283.21 0 top
NOREF#155  -  []  62.92 214.43 90 top
NOREF#156  -  []  45.61 161.15 90 top
NOREF#157  -  []  130.32 198.63 90 top
NOREF#158  -  []  183.07 204.52 90 top
NOREF#159  -  []  148.86 281.18 0 top
NOREF#160  -  []  148.12 209.91 0 top
NOREF#161  -  []  147.2 214.43 0 top
NOREF#162  -  []  203.47 66.04 90 top
NOREF#163  -  []  148.64 213.23 90 top
NOREF#164  -  []  146.78 211.84 0 top
NOREF#165  -  []  232.68 283.21 0 top
NOREF#166  -  []  173.82 216.23 0 top
NOREF#167  -  []  47.26 281.18 0 top
NOREF#168  -  []  54.45 130.81 0 top
NOREF#169  -  []  162.83 88.9 0 top
NOREF#170  -  []  231.66 286.26 90 top
NOREF#171  -  []  86.54 222.05 0 top
NOREF#172  -  []  242.84 281.18 90 top
NOREF#173  -  []  143.32 212.95 0 top
NOREF#174  -  []  262.71 290.83 0 top
NOREF#175  -  []  145.32 218.71 90 top
NOREF#176  -  []  143.62 212.63 0 top
NOREF#177  -  []  43.46 154.18 0 top
NOREF#178  -  []  63.02 199.64 0 top
NOREF#179  -  []  169.18 283.21 0 top
NOREF#180  -  []  109.61 214.23 90 top
NOREF#181  -  []  98.06 286.26 0 top
NOREF#182  -  []  109.61 221.85 90 top
NOREF#183  -  []  148.92 218.71 90 top
NOREF#184  -  []  146.82 212.63 0 top
NOREF#185  -  []  86.54 229.67 0 top
NOREF#186  -  []  85.99 229.47 90 top
NOREF#187  -  []  148.32 213.53 90 top
NOREF#188  -  []  140.99 149.11 90 top
NOREF#189  -  []  86.54 222.05 90 top
NOREF#190  -  []  178.22 209.12 0 top
NOREF#191  -  []  119.9 290.32 0 top
NOREF#192  -  []  86.64 214.88 0 top
NOREF#193  -  []  155.78 172.38 0 top
NOREF#194  -  []  175.28 288.29 0 top
NOREF#195  -  []  140.34 148.46 0 top
NOREF#196  -  []  198.64 285.24 0 top
NOREF#197  -  []  91.96 281.18 90 top
NOREF#198  -  []  141.44 172.38 90 top
NOREF#199  -  []  183.07 211.63 90 top
NOREF#200  -  []  -15.66 125.63 90 top
NOREF#201  -  []  150.72 218.33 90 top
NOREF#202  -  []  277.13 86.36 90 top
NOREF#203  -  []  86.54 237.29 0 top
NOREF#204  -  []  177.28 202.09 90 top
NOREF#205  -  []  39.3 206.81 0 top
NOREF#206  -  []  99.08 288.29 0 top
NOREF#207  -  []  145.22 210.23 0 top
NOREF#208  -  []  39.3 222.05 90 top
NOREF#209  -  []  144.92 216.31 0 top
NOREF#210  -  []  141.92 211.13 90 top
NOREF#211  -  []  168.16 285.24 0 top
NOREF#212  -  []  62.37 214.23 90 top
NOREF#213  -  []  62.92 199.19 0 top
NOREF#214  -  []  147.84 213.23 90 top
NOREF#215  -  []  39.4 214.88 0 top
NOREF#216  -  []  39.3 229.67 90 top
NOREF#217  -  []  149.72 212.15 0 top
NOREF#218  -  []  43.36 162.25 0 top
NOREF#219  -  []  86.54 229.67 90 top
NOREF#220  -  []  103.14 286.26 90 top
NOREF#221  -  []  142.76 290.32 0 top
NOREF#222  -  []  149.32 216.31 90 top
NOREF#223  -  []  85.99 214.23 90 top
NOREF#224  -  []  155.01 210.75 0 top
NOREF#225  -  []  39.3 199.19 0 top
NOREF#226  -  []  62.37 183.75 90 top
NOREF#227  -  []  125.3 149.26 0 top
NOREF#228  -  []  92.98 288.29 0 top
NOREF#229  -  []  127.02 283.21 0 top
NOREF#230  -  []  145.12 213.53 90 top
NOREF#231  -  []  29.05 297.94 0 top
NOREF#232  -  []  38.75 183.75 90 top
NOREF#233  -  []  39.3 222.05 0 top
NOREF#234  -  []  131.54 191.63 90 top
NOREF#235  -  []  121.32 244.63 0 top
NOREF#236  -  []  62.92 214.43 0 top
NOREF#237  -  []  155.58 148.46 0 top
NOREF#238  -  []  144 214.83 90 top
NOREF#239  -  []  39.3 237.29 90 top
NOREF#240  -  []  143.32 216.95 0 top
NOREF#241  -  []  43.36 154.63 0 top
NOREF#242  -  []  184.13 215.06 90 top
NOREF#243  -  []  191.08 135.22 0 top
NOREF#244  -  []  121.32 239.63 90 top
NOREF#245  -  []  39.3 183.95 0 top
NOREF#246  -  []  148.86 286.26 0 top
NOREF#247  -  []  141.6 212.03 0 top
NOREF#248  -  []  156.68 172.38 90 top
NOREF#249  -  []  142.02 210.23 0 top
NOREF#250  -  []  144.12 218.71 0 top
NOREF#251  -  []  29.05 298.96 0 top
NOREF#252  -  []  110.26 207.26 0 top
NOREF#253  -  []  35.8 131.2 0 top
NOREF#254  -  []  155.31 213.36 0 top
NOREF#255  -  []  172.17 204.52 0 top
NOREF#256  -  []  237.76 286.26 0 top
NOREF#257  -  []  148.16 149.01 0 top
NOREF#258  -  []  43.46 161.8 0 top
NOREF#259  -  []  109.61 191.37 90 top
NOREF#260  -  []  155.01 212.28 0 top
NOREF#261  -  []  174.32 200.97 90 top
NOREF#262  -  []  146.82 216.63 0 top
NOREF#263  -  []  86.54 206.81 90 top
NOREF#264  -  []  85.99 221.85 90 top
NOREF#265  -  []  39.3 191.57 0 top
NOREF#266  -  []  39.3 214.43 0 top
NOREF#267  -  []  131.08 281.18 90 top
NOREF#268  -  []  118.13 172.48 90 top
NOREF#269  -  []  146.52 212.31 90 top
NOREF#270  -  []  146.52 212.95 0 top
NOREF#271  -  []  62.92 237.29 0 top
NOREF#272  -  []  62.92 191.57 0 top
NOREF#273  -  []  132.72 148.71 0 top
NOREF#274  -  []  162.83 48.26 0 top
NOREF#275  -  []  20.12 299.3 0 top
NOREF#276  -  []  144.42 219.03 0 top
NOREF#277  -  []  63.02 222.5 0 top
NOREF#278  -  []  86.64 237.74 0 top
NOREF#279  -  []  150.02 211.03 0 top
NOREF#280  -  []  125.32 235.63 0 top
NOREF#281  -  []  86.54 206.81 0 top
NOREF#282  -  []  209.82 286.26 90 top
NOREF#283  -  []  110.26 222.5 0 top
NOREF#284  -  []  62.37 237.09 90 top
NOREF#285  -  []  146.52 216.31 90 top
NOREF#286  -  []  86.54 199.19 0 top
NOREF#287  -  []  132.72 171.83 0 top
NOREF#288  -  []  62.92 183.95 90 top
NOREF#289  -  []  110.16 191.57 0 top
NOREF#290  -  []  149.72 211.51 90 top
NOREF#291  -  []  131.08 286.26 90 top
NOREF#292  -  []  142.82 219.03 0 top
NOREF#293  -  []  136.32 181.63 90 top
NOREF#294  -  []  146.48 212.16 0 top
NOREF#295  -  []  62.37 229.47 90 top
NOREF#296  -  []  172.17 211.63 0 top
NOREF#297  -  []  109.61 229.47 90 top
NOREF#298  -  []  183.72 208.19 0 top
NOREF#299  -  []  39.3 237.29 0 top
NOREF#300  -  []  39.3 191.57 90 top
NOREF#301  -  []  239.03 50.8 0 top
NOREF#302  -  []  91.96 285.24 0 top
NOREF#303  -  []  143.32 210.55 0 top
NOREF#304  -  []  184.58 214.96 90 top
NOREF#305  -  []  38.75 221.85 90 top
NOREF#306  -  []  205.76 288.29 0 top
NOREF#307  -  []  38.75 206.61 90 top
NOREF#308  -  []  119.9 285.24 0 top
NOREF#309  -  []  143.62 216.63 0 top
NOREF#310  -  []  184.62 208.19 90 top
NOREF#311  -  []  86.54 191.57 0 top
NOREF#312  -  []  147.52 213.53 90 top
NOREF#313  -  []  -23.68 303.63 0 top
NOREF#314  -  []  156.23 172.48 90 top
NOREF#315  -  []  199.66 288.29 0 top
NOREF#316  -  []  39.3 214.43 90 top
NOREF#317  -  []  132.92 149.26 0 top
NOREF#318  -  []  141.6 216.03 0 top
NOREF#319  -  []  149.72 212.31 90 top
NOREF#320  -  []  109.61 198.99 90 top
NOREF#321  -  []  63.02 214.88 0 top
NOREF#322  -  []  99.08 283.21 0 top
NOREF#323  -  []  62.92 237.29 90 top
NOREF#324  -  []  236.49 88.9 0 top
NOREF#325  -  []  168.16 286.26 90 top
NOREF#326  -  []  156.68 149.01 90 top
NOREF#327  -  []  141.6 213.23 90 top
NOREF#328  -  []  144 214.83 0 top
NOREF#329  -  []  153.94 281.18 90 top
NOREF#330  -  []  35.8 130.42 90 top
NOREF#331  -  []  147.96 148.46 0 top
NOREF#332  -  []  148 214.43 0 top
NOREF#333  -  []  179.34 281.18 90 top
NOREF#334  -  []  183.52 207.64 0 top
NOREF#335  -  []  148 214.83 90 top
NOREF#336  -  []  156.23 149.11 90 top
NOREF#337  -  []  149.72 212.95 0 top
NOREF#338  -  []  150.02 212.63 0 top
NOREF#339  -  []  141.6 213.23 0 top
NOREF#340  -  []  39.4 237.74 0 top
NOREF#341  -  []  142.76 281.18 90 top
NOREF#342  -  []  97.26 130.73 90 top
NOREF#343  -  []  149.06 172.38 90 top
NOREF#344  -  []  146.82 215.83 0 top
NOREF#345  -  []  172.17 204.52 0 top
NOREF#346  -  []  117.48 171.83 0 top
NOREF#347  -  []  110.16 191.57 90 top
NOREF#348  -  []  162.83 68.58 0 top
NOREF#349  -  []  38.75 237.09 90 top
NOREF#350  -  []  205.76 283.21 0 top
NOREF#351  -  []  126.2 172.38 90 top
NOREF#352  -  []  86.54 191.57 90 top
NOREF#353  -  []  52.34 286.26 90 top
NOREF#354  -  []  39.4 207.26 0 top
NOREF#355  -  []  86.54 183.95 0 top
NOREF#356  -  []  155.01 211.52 0 top
NOREF#357  -  []  136.32 181.63 0 top
NOREF#358  -  []  172.17 211.63 0 top
NOREF#359  -  []  134.32 202.63 90 top
NOREF#360  -  []  173.82 216.23 0 top
NOREF#361  -  []  144.32 215.13 90 top
NOREF#362  -  []  198.64 286.26 90 top
NOREF#363  -  []  144.92 215.51 0 top
NOREF#364  -  []  41.16 285.24 0 top
NOREF#365  -  []  150.02 211.83 0 top
NOREF#366  -  []  144 214.43 0 top
NOREF#367  -  []  239.03 91.44 0 top
NOREF#368  -  []  86.64 230.12 0 top
NOREF#369  -  []  146.12 216.31 90 top
NOREF#370  -  []  142.76 285.24 0 top
NOREF#371  -  []  131.22 224.51 0 top
NOREF#372  -  []  110.16 237.29 0 top
NOREF#373  -  []  148 214.83 0 top
NOREF#374  -  []  149.72 209.91 90 top
NOREF#375  -  []  63.02 184.4 0 top
NOREF#376  -  []  155.31 211.84 0 top
NOREF#377  -  []  42.18 288.29 0 top
NOREF#378  -  []  144.92 212.31 0 top
NOREF#379  -  []  174.32 203.47 0 top
NOREF#380  -  []  110.16 206.81 0 top
NOREF#381  -  []  146.52 209.91 90 top
NOREF#382  -  []  239.03 30.48 0 top
NOREF#383  -  []  39.3 229.67 0 top
NOREF#384  -  []  183.48 214.41 0 top
NOREF#385  -  []  140.34 171.83 0 top
NOREF#386  -  []  85.99 237.09 90 top
NOREF#387  -  []  86.54 237.29 90 top
NOREF#388  -  []  109.61 206.61 90 top
NOREF#389  -  []  236.49 27.94 0 top
NOREF#390  -  []  49.07 153.79 90 top
NOREF#391  -  []  304.32 293.63 0 top
NOREF#392  -  []  146.52 210.55 0 top
NOREF#393  -  []  140.99 172.48 90 top
NOREF#394  -  []  110.16 183.95 0 top
NOREF#395  -  []  155.58 171.83 0 top
NOREF#396  -  []  134.32 226.63 0 top
NOREF#397  -  []  110.16 222.05 90 top
NOREF#398  -  []  125.88 198.79 315 top
NOREF#399  -  []  63.02 230.12 0 top
NOREF#400  -  []  144.92 209.91 0 top
NOREF#401  -  []  62.92 229.67 90 top
NOREF#402  -  []  110.16 183.95 90 top
NOREF#403  -  []  37.73 130.16 90 top
NOREF#404  -  []  118.58 172.38 90 top
NOREF#405  -  []  86.54 183.95 90 top
NOREF#406  -  []  45.06 161.35 90 top
NOREF#407  -  []  38.38 130.81 0 top
NOREF#408  -  []  204.74 281.18 0 top
NOREF#409  -  []  127.02 288.29 0 top
NOREF#410  -  []  119.9 281.18 90 top
NOREF#411  -  []  149.72 210.55 0 top
NOREF#412  -  []  41.16 290.32 0 top
NOREF#413  -  []  110.16 229.67 90 top
NOREF#414  -  []  110.16 229.67 0 top
NOREF#415  -  []  120.92 283.21 0 top
NOREF#416  -  []  146.48 211.52 90 top
NOREF#417  -  []  145.15 211.84 0 top
NOREF#418  -  []  143.62 210.23 0 top
NOREF#419  -  []  48.28 283.21 0 top
NOREF#420  -  []  179.34 286.26 90 top
NOREF#421  -  []  141.6 216.43 90 top
NOREF#422  -  []  148.16 172.38 0 top
NOREF#423  -  []  85.99 183.75 90 top
NOREF#424  -  []  117.68 172.38 0 top
NOREF#425  -  []  91.96 286.26 90 top
NOREF#426  -  []  147.96 171.83 0 top
NOREF#427  -  []  110.26 199.64 0 top
NOREF#428  -  []  149.88 283.21 0 top
NOREF#429  -  []  62.92 183.95 0 top
NOREF#430  -  []  168.16 281.18 90 top
NOREF#431  -  []  49.07 161.41 90 top
NOREF#432  -  []  85.99 198.99 90 top
NOREF#433  -  []  142.76 286.26 90 top
NOREF#434  -  []  183.68 214.96 0 top
NOREF#435  -  []  146.52 215.51 90 top
NOREF#436  -  []  125.1 171.83 0 top
NOREF#437  -  []  45.61 153.53 90 top
NOREF#438  -  []  38.75 214.23 90 top
NOREF#439  -  []  56.02 130.16 90 top
NOREF#440  -  []  155.01 213.04 0 top
NOREF#441  -  []  236.49 68.58 0 top
NOREF#442  -  []  242.84 286.26 90 top
NOREF#443  -  []  144.85 211.52 0 top
NOREF#444  -  []  172.82 203.82 0 top
NOREF#445  -  []  144.32 213.53 90 top
NOREF#446  -  []  123.32 229.41 0 top
NOREF#447  -  []  85.99 206.61 90 top
NOREF#448  -  []  145.22 215.83 0 top
NOREF#449  -  []  38.28 130.36 90 top
NOREF#450  -  []  286.62 112.62 90 top
NOREF#451  -  []  62.92 199.19 90 top
NOREF#452  -  []  56.67 130.81 0 top
NOREF#453  -  []  173.82 201.42 90 top
NOREF#454  -  []  165.37 91.44 0 top
NOREF#455  -  []  149.72 210.71 90 top
NOREF#456  -  []  141.92 215.13 90 top
NOREF#457  -  []  277.13 66.04 90 top
NOREF#458  -  []  148.92 219.35 0 top
NOREF#459  -  []  147.62 219.03 0 top
NOREF#460  -  []  156.21 212.28 90 top
NOREF#461  -  []  109.61 183.75 90 top
NOREF#462  -  []  231.66 285.24 0 top
NOREF#463  -  []  41.16 286.26 90 top
NOREF#464  -  []  149.32 209.91 90 top
NOREF#465  -  []  141.92 218.33 90 top
NOREF#466  -  []  86.64 184.4 0 top
NOREF#467  -  []  148.61 172.48 90 top
NOREF#468  -  []  141.92 216.73 90 top
NOREF#469  -  []  -23.68 125.63 90 top
NOREF#470  -  []  177.28 202.09 0 top
NOREF#471  -  []  133.37 149.36 90 top
NOREF#472  -  []  277.13 45.72 90 top
NOREF#473  -  []  110.26 237.74 0 top
NOREF#474  -  []  143.32 209.91 90 top
NOREF#475  -  []  239.03 71.12 0 top
NOREF#476  -  []  117.48 148.71 0 top
NOREF#477  -  []  110.16 199.19 90 top
NOREF#478  -  []  177.6 202.39 90 top
NOREF#479  -  []  63.02 237.74 0 top
NOREF#480  -  []  148.32 215.13 90 top
NOREF#481  -  []  150.02 210.23 0 top
NOREF#482  -  []  133.37 172.48 90 top
NOREF#483  -  []  144.64 213.23 90 top
NOREF#484  -  []  147.32 218.71 0 top
NOREF#485  -  []  146.52 216.95 0 top
NOREF#486  -  []  231.66 290.32 0 top
NOREF#487  -  []  143.32 212.31 90 top
NOREF#488  -  []  39.3 199.19 90 top
NOREF#489  -  []  174.26 281.18 0 top
NOREF#490  -  []  38.75 191.37 90 top
NOREF#491  -  []  181.42 205.92 90 top
NOREF#492  -  []  28.69 298.57 0 top
NOREF#493  -  []  47.49 153.79 0 top
NOREF#494  -  []  47.26 286.26 0 top
NOREF#495  -  []  54.09 130.42 90 top
NOREF#496  -  []  286.62 214.63 90 top
NOREF#497  -  []  110.26 214.88 0 top
NOREF#498  -  []  145.22 212.63 0 top
NOREF#499  -  []  142.52 218.71 90 top
NOREF#500  -  []  117.68 149.26 0 top
NOREF#501  -  []  140.54 149.01 0 top
NOREF#502  -  []  146.12 212.31 90 top
NOREF#503  -  []  142.24 218.03 90 top
NOREF#504  -  []  143.78 283.21 0 top
NOREF#505  -  []  133.82 172.38 90 top
NOREF#506  -  []  62.92 222.05 90 top
NOREF#507  -  []  168.16 290.32 0 top
NOREF#508  -  []  36.17 130.81 0 top
NOREF#509  -  []  28.69 298.57 90 top
NOREF#510  -  []  143.32 216.31 90 top
NOREF#511  -  []  181.42 205.92 0 top
OSC1  OSC25M-S3225-AKER-3.3V  [OSC_3P2X2P5_4P_AKER]  174.92 202.22 180 bottom
R1  470-1-S4  [R0402]  107.71 184.4 180 top
R2  470-1-S4  [R0402]  84.09 184.4 180 top
R3  470-1-S4  [R0402]  60.47 184.4 180 top
R4  470-1-S4  [R0402]  36.85 207.26 180 top
R5  470-1-S4  [R0402]  36.85 199.64 180 top
R6  470-1-S4  [R0402]  36.85 192.02 180 top
R7  470-1-S4  [R0402]  60.47 207.26 180 top
R8  470-1-S4  [R0402]  60.47 199.64 180 top
R9  470-1-S4  [R0402]  60.47 192.02 180 top
R10  470-1-S4  [R0402]  84.09 192.02 180 top
R11  470-1-S4  [R0402]  107.71 192.02 180 top
R12  470-1-S4  [R0402]  84.09 199.64 180 top
R13  470-1-S4  [R0402]  107.71 199.64 180 top
R14  470-1-S4  [R0402]  84.09 207.26 180 top
R15  470-1-S4  [R0402]  107.71 207.26 180 top
R16  470-1-S4  [R0402]  36.85 184.4 180 top
R17  470-1-S4  [R0402]  36.85 214.88 180 top
R18  470-1-S4  [R0402]  60.47 214.88 180 top
R19  470-1-S4  [R0402]  84.09 214.88 180 top
R20  470-1-S4  [R0402]  107.71 214.88 180 top
R21  470-1-S4  [R0402]  36.85 222.5 180 top
R22  470-1-S4  [R0402]  60.47 222.5 180 top
R23  470-1-S4  [R0402]  84.09 222.5 180 top
R24  470-1-S4  [R0402]  107.71 222.5 180 top
R25  470-1-S4  [R0402]  36.85 230.12 180 top
R26  470-1-S4  [R0402]  60.47 230.12 180 top
R27  470-1-S4  [R0402]  84.09 230.12 180 top
R28  470-1-S4  [R0402]  107.71 230.12 180 top
R29  470-1-S4  [R0402]  36.85 237.74 180 top
R30  470-1-S4  [R0402]  60.47 237.74 180 top
R31  470-1-S4  [R0402]  84.09 237.74 180 top
R32  470-1-S4  [R0402]  107.71 237.74 180 top
R33  470-1-S4  [R0402]  118.13 169.93 270 top
R34  470-1-S4  [R0402]  140.99 169.93 270 top
R35  470-1-S4  [R0402]  118.13 146.81 270 top
R36  470-1-S4  [R0402]  140.99 146.56 270 top
R37  470-1-S4  [R0402]  125.75 169.93 270 top
R38  470-1-S4  [R0402]  148.61 169.93 270 top
R39  470-1-S4  [R0402]  125.75 146.81 270 top
R40  470-1-S4  [R0402]  148.61 146.56 270 top
R41  470-1-S4  [R0402]  133.37 169.93 270 top
R42  470-1-S4  [R0402]  156.23 169.93 270 top
R43  470-1-S4  [R0402]  133.37 146.81 270 top
R44  470-1-S4  [R0402]  156.23 146.56 270 top
R45  470-1-S4  [R0402]  184.17 205.74 270 top
R46  470-1-S4  [R0402]  184.13 213.02 270 top
R123  NC/0-5-S8  [R0805]  143.78 293.37 90 bottom
R124  0-5-S8  [R0805]  141.24 293.37 90 bottom
R125  0-5-SA  [R1206]  146.83 293.37 90 bottom
R126  NC/0-5-SA  [R1206]  149.88 293.37 90 bottom
R127  0-5-S8  [R0805]  138.7 293.37 90 bottom
R128  NC/0-5-S8  [R0805]  136.16 293.37 90 bottom
R129  NC/0-5-S8  [R0805]  199.66 293.37 90 bottom
R130  0-5-S8  [R0805]  197.12 293.37 90 bottom
R131  NC/0-5-SA  [R1206]  205.76 293.37 90 bottom
R132  0-5-SA  [R1206]  202.71 293.37 90 bottom
R133  0-5-S8  [R0805]  194.58 293.37 90 bottom
R134  NC/0-5-S8  [R0805]  192.04 293.37 90 bottom
R135  NC/0-5-S8  [R0805]  232.68 293.37 90 bottom
R136  0-5-S8  [R0805]  230.14 293.37 90 bottom
R137  0-5-SA  [R1206]  235.73 293.37 90 bottom
R138  NC/0-5-SA  [R1206]  238.78 293.37 90 bottom
R139  0-5-S8  [R0805]  227.6 293.37 90 bottom
R140  NC/0-5-S8  [R0805]  225.06 293.37 90 bottom
R141  NC/0-5-S8  [R0805]  42.18 293.37 90 bottom
R142  0-5-S8  [R0805]  39.64 293.37 90 bottom
R143  0-5-SA  [R1206]  45.23 293.37 90 bottom
R144  NC/0-5-SA  [R1206]  48.28 293.37 90 bottom
R145  0-5-S8  [R0805]  37.1 293.37 90 bottom
R146  NC/0-5-S8  [R0805]  34.56 293.37 90 bottom
R147  NC/0-5-S8  [R0805]  169.18 293.37 90 bottom
R148  0-5-S8  [R0805]  166.64 293.37 90 bottom
R149  0-5-SA  [R1206]  172.23 293.37 90 bottom
R150  NC/0-5-SA  [R1206]  175.28 293.37 90 bottom
R151  0-5-S8  [R0805]  164.1 293.37 90 bottom
R152  NC/0-5-S8  [R0805]  161.56 293.37 90 bottom
R153  NC/0-5-S8  [R0805]  92.98 293.37 90 bottom
R154  0-5-S8  [R0805]  90.44 293.37 90 bottom
R155  0-5-SA  [R1206]  96.03 293.37 90 bottom
R156  NC/0-5-SA  [R1206]  99.08 293.37 90 bottom
R157  0-5-S8  [R0805]  87.9 293.37 90 bottom
R158  NC/0-5-S8  [R0805]  85.36 293.37 90 bottom
R159  NC/0-5-S8  [R0805]  120.92 293.37 90 bottom
R160  0-5-S8  [R0805]  118.38 293.37 90 bottom
R161  NC/0-5-SA  [R1206]  127.02 293.37 90 bottom
R162  0-5-SA  [R1206]  123.97 293.37 90 bottom
R163  0-5-S8  [R0805]  115.84 293.37 90 bottom
R164  NC/0-5-S8  [R0805]  113.3 293.37 90 bottom
RB1  10K-1-S6  [R0603]  67.07 18.03 270 bottom
RB2  10K-1-S6  [R0603]  67.07 14.48 90 bottom
SB1  SHORT  [DEFAULT_SHORT_SMALL]  254.02 10.41 0 top
SB13  SHORT  [DEFAULT_SHORT_SMALL]  185.94 418.85 180 top
SB14  SHORT  [DEFAULT_SHORT_SMALL]  106.7 10.41 0 top
SB15  SHORT  [DEFAULT_SHORT_SMALL]  38.62 418.85 180 top
SCREW1  FY-V93KHSCREW  [PG_VG93K_F_HALFOUTLINE_FY]  146.32 214.63 0 top
SH3  SHORT  [DEFAULT_SHORT_SMALL]  140.72 288.63 180 bottom
SH4  SHORT  [DEFAULT_SHORT_SMALL]  140.73 287.78 180 bottom
SH5  SHORT  [DEFAULT_SHORT_SMALL]  196.6 288.63 180 bottom
SH6  SHORT  [DEFAULT_SHORT_SMALL]  196.61 287.78 180 bottom
SH7  SHORT  [DEFAULT_SHORT_SMALL]  229.62 288.63 180 bottom
SH8  SHORT  [DEFAULT_SHORT_SMALL]  229.63 287.78 180 bottom
SH9  SHORT  [DEFAULT_SHORT_SMALL]  39.12 288.63 180 bottom
SH10  SHORT  [DEFAULT_SHORT_SMALL]  39.13 287.78 180 bottom
SH11  SHORT  [DEFAULT_SHORT_SMALL]  166.12 288.63 180 bottom
SH12  SHORT  [DEFAULT_SHORT_SMALL]  166.13 287.78 180 bottom
SH13  SHORT  [DEFAULT_SHORT_SMALL]  89.92 288.63 180 bottom
SH14  SHORT  [DEFAULT_SHORT_SMALL]  89.93 287.78 180 bottom
SH15  SHORT  [DEFAULT_SHORT_SMALL]  117.86 288.63 180 bottom
SH16  SHORT  [DEFAULT_SHORT_SMALL]  117.87 287.78 180 bottom
SITE1  FSS0AS071A  [SK_BGA17X17_336P_0P8MM_S071AA]  146.32 214.63 0 top
TP_DPS11  TP01  [TP_040_T]  124.2 279.15 0 top
TP_DPS12  TP01  [TP_040_T]  96.26 279.15 0 top
TP_DPS13  TP01  [TP_040_T]  45.46 279.15 0 top
TP_DPS14  TP01  [TP_040_T]  235.96 279.15 0 top
TP_DPS21  TP01  [TP_040_T]  202.94 279.15 0 top
TP_DPS22  TP01  [TP_040_T]  172.46 279.15 0 top
TP_DPS23  TP01  [TP_040_T]  147.06 279.15 0 top
TR2  0-5-S4  [R0402_UNBGA_V2]  29.48 297.94 0 bottom
TR3  0-5-S4  [R0402_UNBGA_V2]  29.48 298.96 0 bottom
UB1  AT24C04C-SSHM-SO8  [SO8_215X127MM]  72.66 17.53 180 bottom
UHC230  UHC4A  [PG_VG93K_PF_UHC4_G8D230_A34_V2]  35.83 351.79 0 top
UHC430  UHC4B  [PG_VG93K_PF_UHC4_G8D430_B12_V2]  35.83 361.95 0 top
UNK038FY-S135BB14Q-A100  REF-CODE-PCB  [PCB_CODE]  231.41 210.57 0 top
UNK980FY-S071AA-1AH  REF-CODE-PCB  [PCB_CODE]  231.16 205.23 0 top
UT_UP5V1  TP03-D  [TP_060_040]  94 134.87 0 top
UTL1  V93K_UTL  [PG_VG93K_F_G3UTI1]  35.83 16.51 0 top
UTL2  V93K_UTL  [PG_VG93K_F_G1UTI2]  183.15 16.51 0 top
UTL3  V93K_UTL  [PG_VG93K_F_G2UTI3]  256.81 412.75 0 top
UTL4  V93K_UTL  [PG_VG93K_F_G8UTI4]  109.49 412.75 0 top
XC1  0.1U-50-X-S4-MU  [C0402]  72.66 21.08 180 bottom

## Library data of the parts
BDB4-BDB10 BDB13-BDB45 = BD120-3A-S8: User Part Number: PNXXXXXXXXXX; Tolerance: TOL
BGA289-12X12-P0.65 JG-250905AA011 = REF-CODE-SOCKET
C1 = 0.01U-16-X7R-S4-YA: User Part Number: PNXXXXXXXXXX; Tolerance: TOL
C2 = 3.3U-10-X-S4-TDK: User Part Number: PNXXXXXXXXXX; Tolerance: TOL
C3 C4 C50 C51 C56 C58 C62 C64 C68 C70 C74 C76 C81 C82 CB2 CB4 CB6 CB8 = 10U-25-X7R-SA: User Part Number: PNXXXXXXXXXX; Tolerance: TOL
C5 C8 C52 C55 C57 C61 C63 C67 C69 C73 C75 C79 C80 C85 = 22U-16-X-SB: User Part Number: PNXXXXXXXXXX; Tolerance: TOL
C6 C53 C59 C65 C71 C77 C83 = 47U-16-X5R-SB-MU: User Part Number: PNXXXXXXXXXX; Tolerance: TOL
C7 C54 C60 C66 C72 C78 C84 = 100U-10-X5R-SB-MU: User Part Number: PNXXXXXXXXXX; Tolerance: TOL
C9-C49 = 0.1U-16-X-S2-TDK: User Part Number: PNXXXXXXXXXX; Tolerance: TOL
CB1 CB3 CB5 CB7 = 0.1U-25-X-S6: User Part Number: PNXXXXXXXXXX; Tolerance: TOL
CSDPS225 CSDPS229 CSDPS425 CSDPS429 = V93K_CSDPS_DPS32: User Part Number: PNXXXXXXXXXX; Tolerance: TOL
CSDPS226 CSDPS426 = V93K_CSDPS_A: User Part Number: PNXXXXXXXXXX; Tolerance: TOL
D101-D124 D227 D228 D231 D232 D301-D324 D427 D428 D431 D432 = V93K_CH: Tolerance: TOL; User Part Number: PNXXXXXXXXXX
DPS1-DPS3 DPS8 = V93K_DPS: Tolerance: TOL; User Part Number: PNXXXXXXXXXX
FD1-FD16 TP_DPS11-TP_DPS14 TP_DPS21-TP_DPS23 = TP01: Tolerance: TOL; User Part Number: PNXXXXXXXXXX
FSS0AS071A = REF-CODE-CHIP
H1-H4 = M3-HOLE: Tolerance: TOL; User Part Number: PNXXXXXXXXXX
K1-K44 = 2911-05-321-A-V2: Tolerance: TOL; User Part Number: PNXXXXXXXXXX
K45 K46 = UA2-5NJ-A-V3: Tolerance: TOL; User Part Number: PNXXXXXXXXXX
KB1-2-KB1-4 KB1-6-KB1-8 KB2-2-KB2-4 KB2-6-KB2-8 KB3-4 KB3-5 KB3-8 KB4-4 KB4-5 KB4-8 UT_UP5V1 = TP03-D: Tolerance: TOL; User Part Number: PNXXXXXXXXXX
KS1 KS2 = 712D-5-V2: Tolerance: TOL; User Part Number: PNXXXXXXXXXX
KS3 KS4 = 2911-05-321-A: Tolerance: TOL; User Part Number: PNXXXXXXXXXX
LD1-LD46 = LDG-2-S6: Tolerance: TOL; User Part Number: PNXXXXXXXXXX
LDB1 = LDG-2-S8: User Part Number: PNXXXXXXXXXX; Tolerance: TOL
LDB2-LDB5 = LDG-2-S4: Tolerance: TOL; User Part Number: PNXXXXXXXXXX
LOGO1 = LOGO_KT_KSMT
LOGO2 = LOGO_FY_Faraday
LRB1 = 330-1-S6: User Part Number: PNXXXXXXXXXX; Tolerance: TOL
LRB2-LRB5 R1-R46 = 470-1-S4: User Part Number: PNXXXXXXXXXX; Tolerance: TOL
M5 = V93K-TOUCHSENSOR-FY: Tolerance: TOL; User Part Number: PNXXXXXXXXXX
OSC1 = OSC25M-S3225-AKER-3.3V: Tolerance: TOL; User Part Number: PNXXXXXXXXXX
R123 R124 R127-R130 R133-R136 R139-R142 R145-R148 R151-R154 R157-R160 R163 R164 = 0-5-S6: User Part Number: PNXXXXXXXXXX; Tolerance: TOL
R125 R126 R131 R132 R137 R138 R143 R144 R149 R150 R155 R156 R161 R162 = 0-5-SA: User Part Number: PNXXXXXXXXXX; Tolerance: TOL
RB1 RB2 = 10K-1-S6: User Part Number: PNXXXXXXXXXX; Tolerance: TOL
SB1 SB13-SB15 SH3-SH16 = SHORT: User Part Number: PNXXXXXXXXXX; Tolerance: TOL
SCREW1 = FY-V93KHSCREW: Tolerance: TOL; User Part Number: PNXXXXXXXXXX
SITE1 = FSS0AS071A: Tolerance: TOL; User Part Number: PNXXXXXXXXXX
TR2 TR3 = 0-5-S4: User Part Number: PNXXXXXXXXXX; Tolerance: TOL
UB1 = AT24C04C-SSHM-SO8: User Part Number: PNXXXXXXXXXX; Tolerance: TOL
UHC230 = UHC4A: User Part Number: PNXXXXXXXXXX; Tolerance: TOL
UHC430 = UHC4B: User Part Number: PNXXXXXXXXXX; Tolerance: TOL
UNK038FY-S135BB14Q-A100 UNK980FY-S071AA-1AH = REF-CODE-PCB
UTL1-UTL4 = V93K_UTL: User Part Number: PNXXXXXXXXXX; Tolerance: TOL
XC1 = 0.1U-50-X-S4-MU: User Part Number: PNXXXXXXXXXX; Tolerance: TOL

## Footprints (pads in the part's own frame, mm; a bottom-side part is the same pattern mirrored in y, then rotated)
C0201
  rect 0.305x0.356 smd: 1(-0.3,0) 2(0.3,0)
C0402
  custom 0.6x0.6 smd: 1(-0.5,0) 2(0.5,0)
C0603
  rect 0.889x0.889 smd: 1(-0.85,0) 2(0.85,0)
C1206
  rect 1.321x1.829 smd: 1(-1.25,0) 2(1.25,0)
C1210
  rect 1.27x3.048 smd: 1(-1.524,0) 2(1.524,0)
CHIP_CODE
  round 0.051 smd: 1(0,0)
DEFAULT_SHORT_SMALL
  custom 1.1x0.28 smd: 1(-0.5,0) 2(0.5,0)
FB0805
  rect 1.118x1.372 smd: 1(-0.965,0) 2(0.965,0)
FD_040_V2
  round 1.016 smd: 1(0,0)
